# Altium PCB lab04.PcbDoc
Units mil, origin at the board's own origin, x right, y up, seen from the top; angles counter-clockwise.
Board outline 3242.38 x 1652.99 mil, 2 copper layers (Top Layer, Top, Bottom Layer, Bottom); 16 components, 11 nets, 42 pads, 1 vias.
Unrouted connection lines stored in the file: 1.
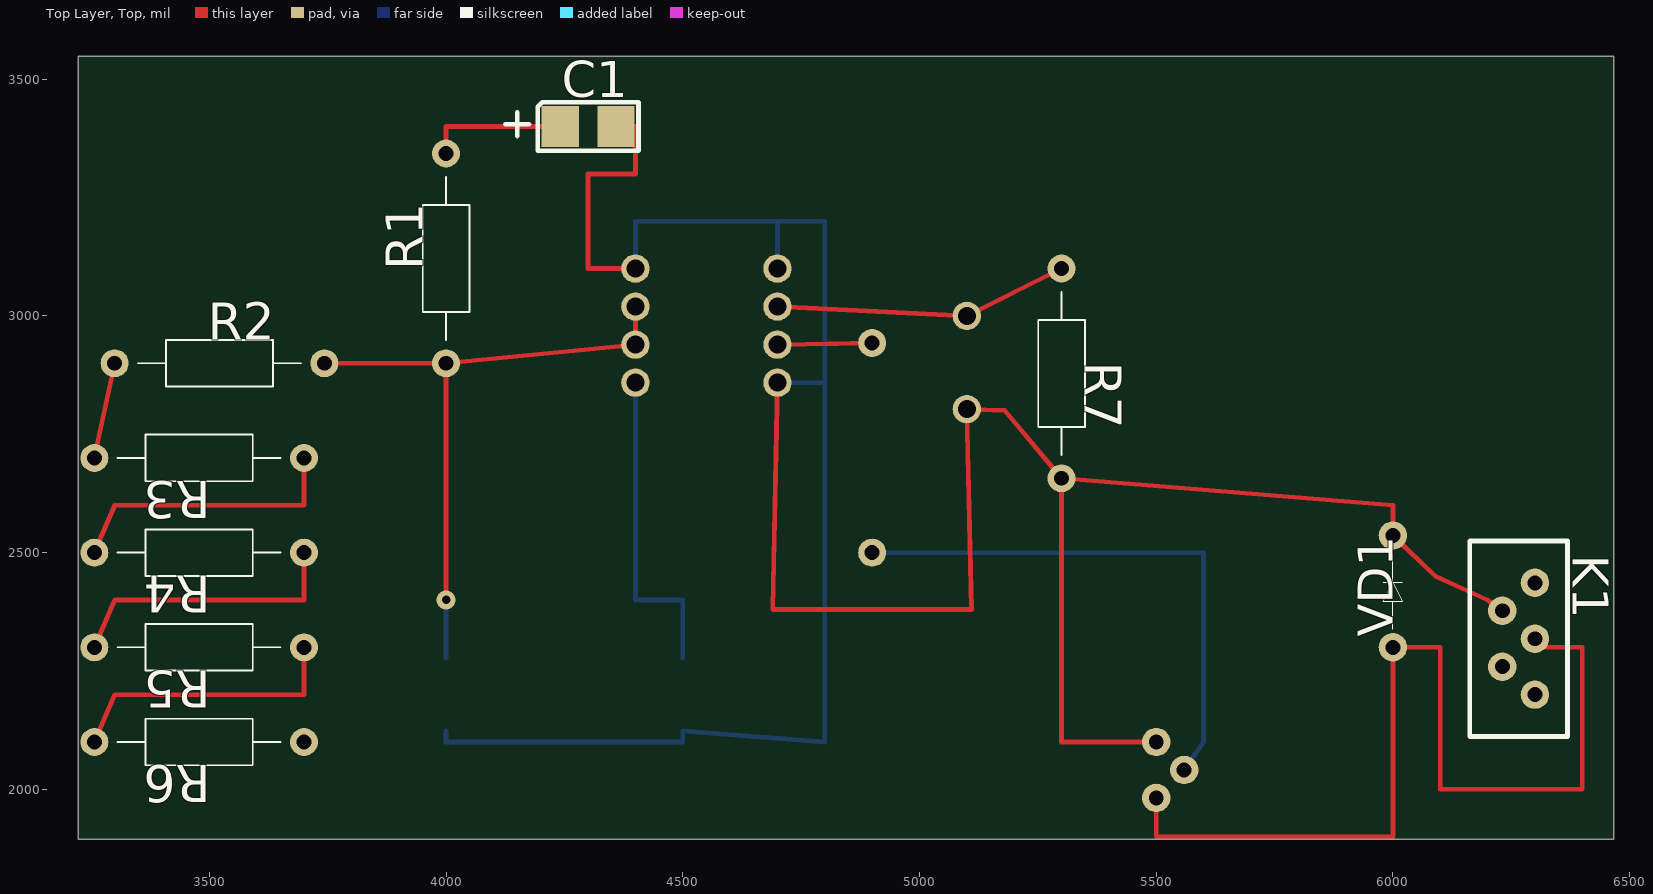
[diagram p0: Top Layer, Top view]
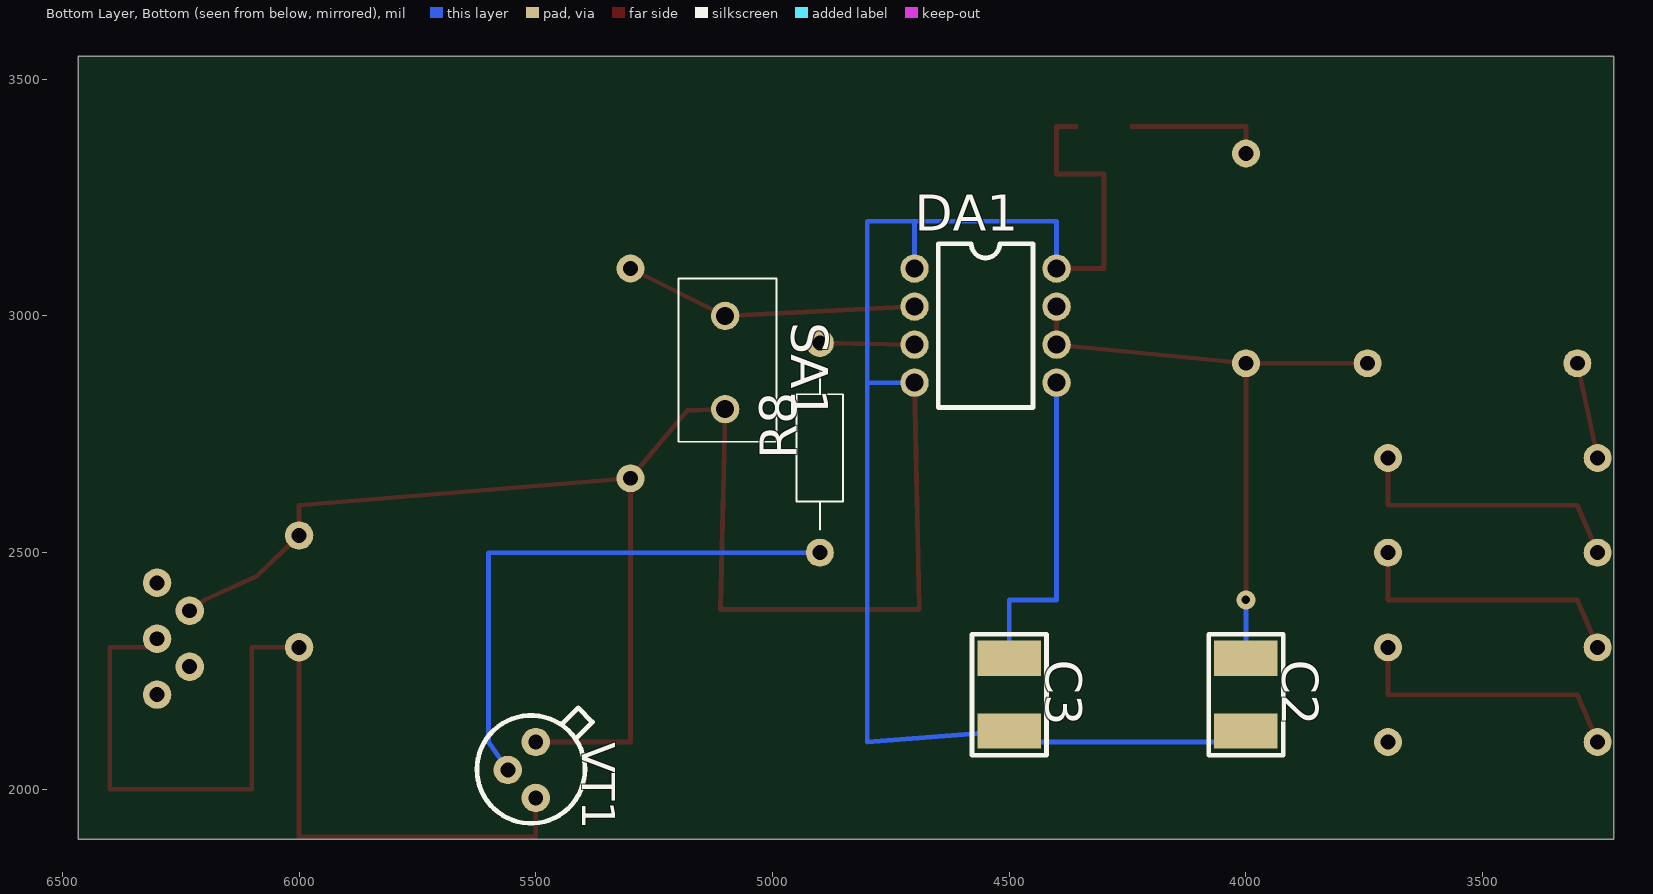
[diagram p1: Bottom Layer, Bottom view, seen from below]

## Layer stack, top to bottom
Top Solder, Top Mask: solder mask 0.4, Solder Resist, Dk 3.5
Top Layer, Top: signal copper 1.4
Dielectric 1: dielectric 12.6, FR-4, Dk 4.8
Bottom Layer, Bottom: signal copper 1.4
Bottom Solder, Bot Mask: solder mask 0.4, Solder Resist, Dk 3.5

## Board outline
3223.56,1895 6465.94,1895 6465.94,3547.99 3223.56,3547.99

## Design rules (kind name [scope] priority, off if disabled: settings)
Clearance [All] p1: gap=10 ignorepadtopadclearanceinfootprint=FALSE except(0: Arc-Hole Track-Hole SMDPad-Hole THPad-Hole Via-Hole Fill-Hole Poly-Hole Region-Hole Text-Hole; 12: Arc-Arc Arc-Track Arc-THPad Arc-Via Track-Track Track-THPad Track-Via THPad-THPad THPad-Via Via-Via)
PlaneClearance [All] p1: clearance=10
PolygonConnect [All] p1: connectstyle=Relief reliefconductorwidth=10 reliefentries=4 polygonreliefangle="90 Angle" airgapwidth=10
RoutingVias [All] p1: holewidth=28 width=50 viastyle="Through Hole" minholewidth=28 minwidth=50 maxholewidth=28 maxwidth=50
SolderMaskExpansion [All] p1: expansion=4 istentingtop=FALSE
Width [All] p1: maxlimit=10 minlimit=10 preferedwidth=10
29 further rules are at their usual default settings.

## Components (designator, comment, footprint, x,y, rotation, side; value= is the part's Value field where it differs from the comment)
C1 "" CE3528-B 4300,3400 r0 top
C2 "" CC1812 4000,2200 r270 bottom
C3 "" CC1812 4500,2200 r270 bottom
DA1 "" LMC555 4700,3100 r180 bottom
K1 "" RES49 6300,2200 r270 top
R1 "" C2-33H-0.125W 4000,2900 r90 top
R2 "" C2-33H-0.125W 3300,2900 r0 top
R3 "" C2-33H-0.125W 3700,2700 r180 top
R4 "" C2-33H-0.125W 3700,2500 r180 top
R5 "" C2-33H-0.125W 3700,2300 r180 top
R6 "" C2-33H-0.125W 3700,2100 r180 top
R7 "" C2-33H-0.125W 5300,3100 r270 top
R8 "" C2-33H-0.125W 4900,2500 r90 bottom
SA1 "" 8AS9M2RE 5100,3000 r270 bottom
VD1 "" D6 6000,2300 r90 top
VT1 "" TO-18 5500,2100 r270 bottom

## Footprints (in the part's own frame and the unit in brackets; to place one, negate y for a bottom-side part, rotate by r counter-clockwise, add the part's x,y. Pads: shape width x height; smd on the part's side, far side on the other; paste and mask are expansions set on the pad)
8AS9M2RE [mil]
  round 60 hole 38: 1(0,0) 2(196.85,0)
  silkscreen extent -79,-98 266,108
C2-33H-0.125W [mm]
  round 1.5 hole 0.8: 1(0,0) 2(11.25,0)
  silkscreen extent 1.25,-1.25 10,1.25
CC1812 [mm]
  rect 1.9x3.4 smd: 1(-1.95,0) 2(1.95,0)
  silkscreen extent -3.25,-2 3.25,2
CE3528-B [mm]
  rect 2x2.2 smd: 1(-1.5,0) 2(1.5,0)
  silkscreen extent -4.44,-1.3 2.7,1.3
D6 [mil]
  round 60 hole 31.5: 1(0,0) 2(236.22,0)
  silkscreen extent 39,-19 196,20
LMC555 [mil]
  round 60 hole 38: 1(0,0) 2(0,-80.32) 3(0,-160.63) 4(0,-240.94) 5(300,-240.94) 6(300,-160.63) 7(300,-80.32) 8(300,0)
  silkscreen extent 50,-293 250,52
RES49 [mm]
  round 1.524 hole 0.8: 1(0,0) 2(-6,0) 3(-1.5,-1.75) 4(-3,0) 5(-4.5,-1.75)
  silkscreen extent -8.25,-3.5 2.25,1.75
TO-18 [mil]
  round 60 hole 31.5: 1(118.11,0) 2(0,0) 3(59.06,-59.06)
  silkscreen extent -72,-124 172,120

## Via types
v1: diameter 40, hole 18, Top Layer, Top to Bottom Layer, Bottom, 1 vias

## Nets (pads, with @x,y where several pads share a name; then routed paths per layer and width w, separated by ;. In a path a pad name is that pad's centre, name@x,y a point inside that pad or via, vN(x,y) a via of type N, cw(c..) or ccw(c..) an arc to the next point about the centre after c; other vN are vias at no path point)
NET00000: K1.4 VD1.1 VT1.1 | length 2100
  Top Layer, Top w10: VT1.1 5500,1900 6000,1900 VD1.1 6100,2300 6100,2000 6400,2000 6400,2300 6300,2300 K1.4
NET00001: R8.1 VT1.3 | length 1171.9
  Bottom Layer, Bottom w10: R8.1 5600,2500 5600,2100 VT1.3
NET00002: DA1.3 R8.2 | length 200
  Top Layer, Top w10: DA1.3 4760,2940 R8.2
NET00003: C3.1 DA1.5 | length 682.3
  Bottom Layer, Bottom w10: DA1.5 4400,2400 4500,2400 C3.1
NET00004: DA1.2 R7.1 SA1.1 | length 624.1
  Top Layer, Top w10: DA1.2 SA1.1 R7.1
NET00006: R2.1 R3.2 | length 204.6
  Top Layer, Top w10: R3.2 R2.1
NET00007: R3.1 R4.2 | length 608.8
  Top Layer, Top w10: R4.2 3300,2600 3700,2600 R3.1
NET00008: R4.1 R5.2 | length 608.8
  Top Layer, Top w10: R5.2 3300,2400 3700,2400 R4.1
NET00009: R5.1 R6.2 | length 608.8
  Top Layer, Top w10: R6.2 3300,2200 3700,2200 R5.1
NET00013: C2.1 DA1.6 DA1.7 R1.1 R2.2 | length 1362.6
  Top Layer, Top w10: R2.2 R1.1 ; v1(4000,2400) R1.1 ; DA1.7 DA1.6 R1.1
  Bottom Layer, Bottom w10: C2.1 v1(4000,2400)
VCC: C1.1 C1.2 C2.2 C3.2 DA1.1 DA1.4 DA1.8 K1.5 R1.2 R7.2 SA1.2 VD1.2 VT1.2 | length 6882.7
  Top Layer, Top w10: R1.2 4000,3400 C1.1 ; C1.2 4400,3400 4400,3300 4300,3300 4300,3100 DA1.8 ; DA1.4 4690,2380 5110,2380 SA1.2 5180,2800 R7.2 ; VT1.2 5300,2100 R7.2 ; K1.5 6200,2400 6090,2450 VD1.2 6000,2600 R7.2
  Bottom Layer, Bottom w10: C2.2 4000,2100 4500,2100 C3.2 4800,2100 4800,2859.06 ; DA1.8 4400,3200 4700,3200 ; DA1.4 4800,2859.06 ; DA1.1 4700,3200 ; 4700,3200 4800,3200 4800,2859.06
pads on no net: K1.1 K1.2 K1.3 R6.1